# Altium PCB Soldeerbout12002498.PcbDoc
Units mm, origin at the board's own origin, x right, y up, seen from the top; angles counter-clockwise.
Board outline 152.4 x 101.6 mm, 2 copper layers (Top Layer, Bottom Layer); 76 components, 75 nets, 278 pads, 15 vias.
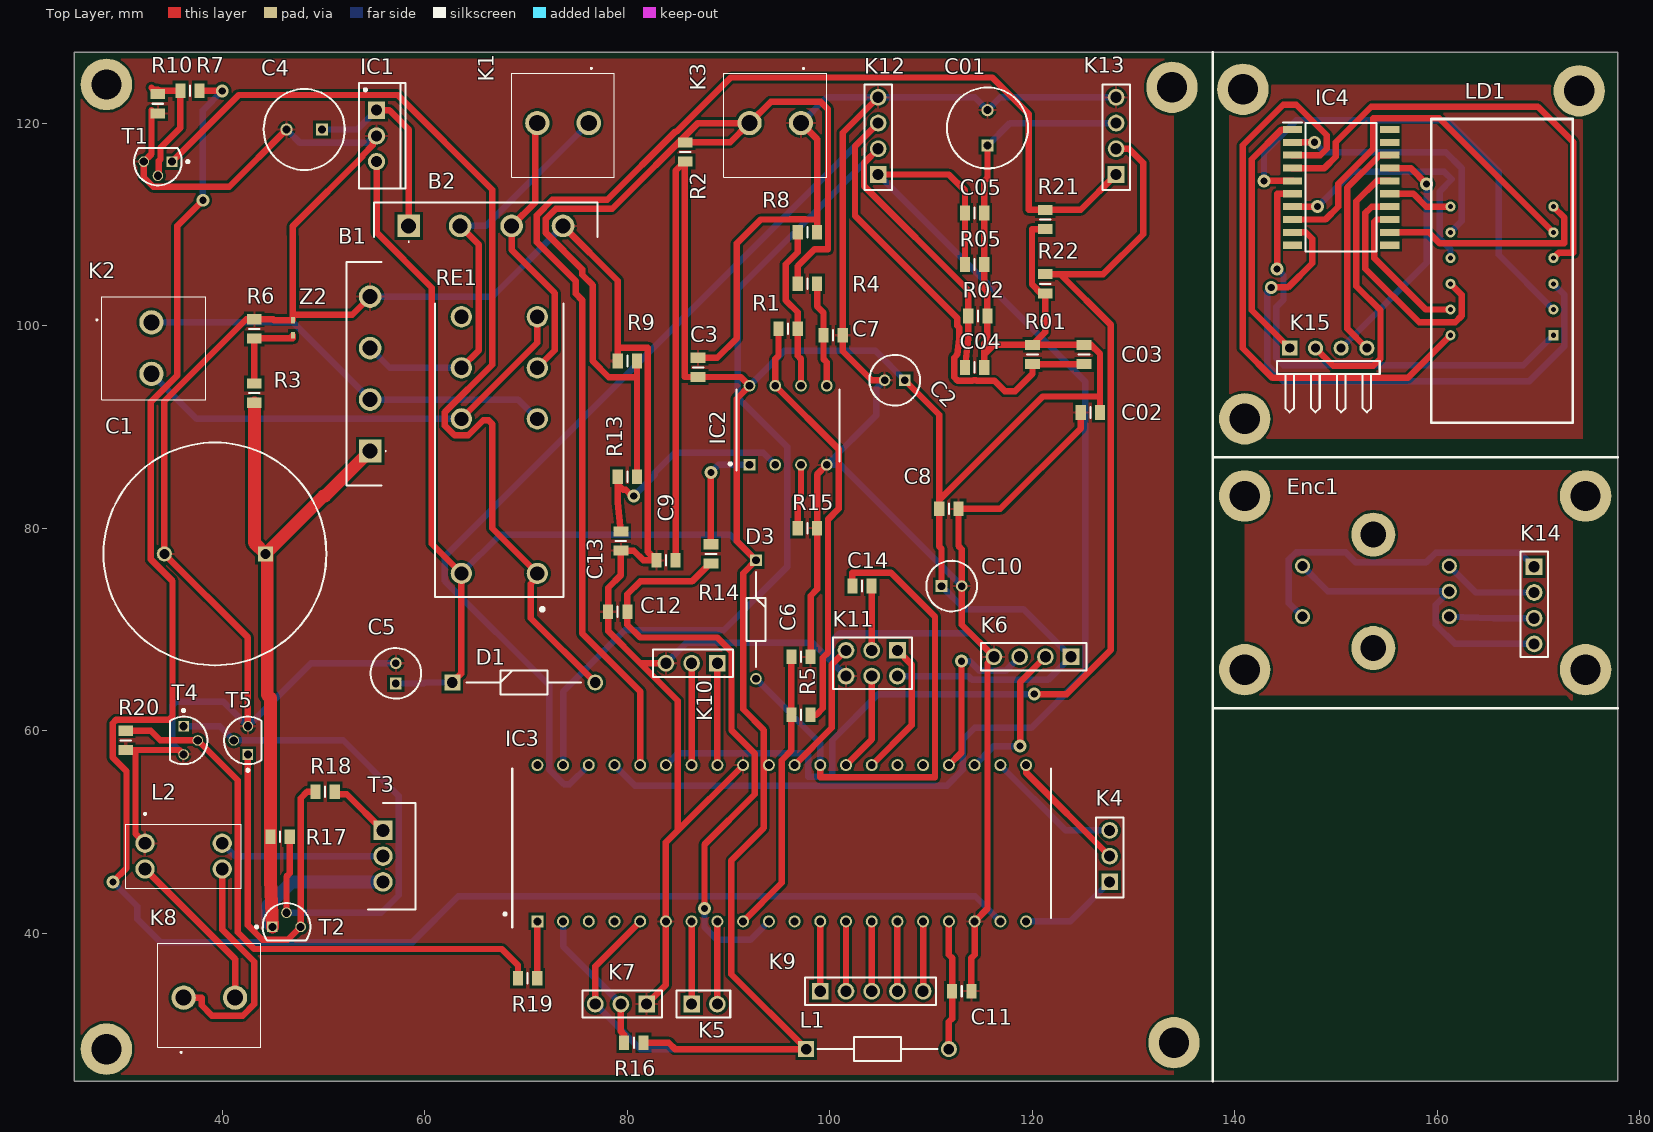
[diagram p0: Top Layer view]
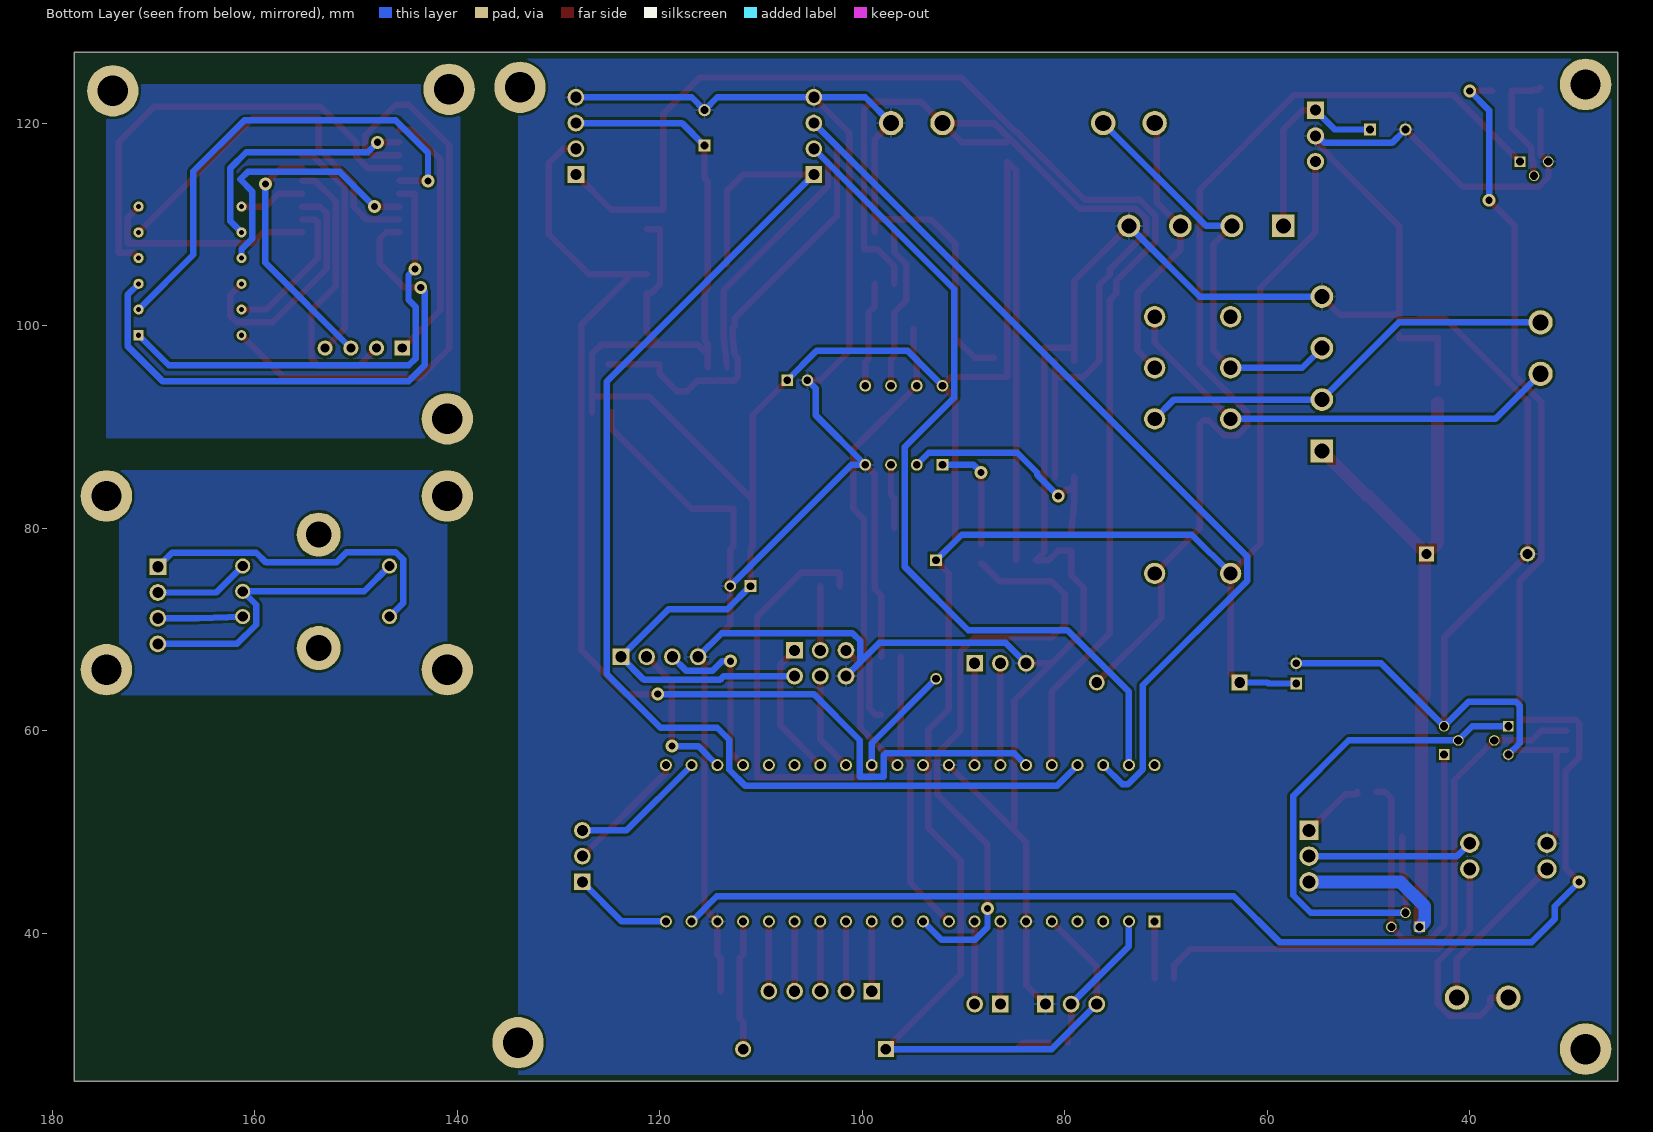
[diagram p1: Bottom Layer view, seen from below]
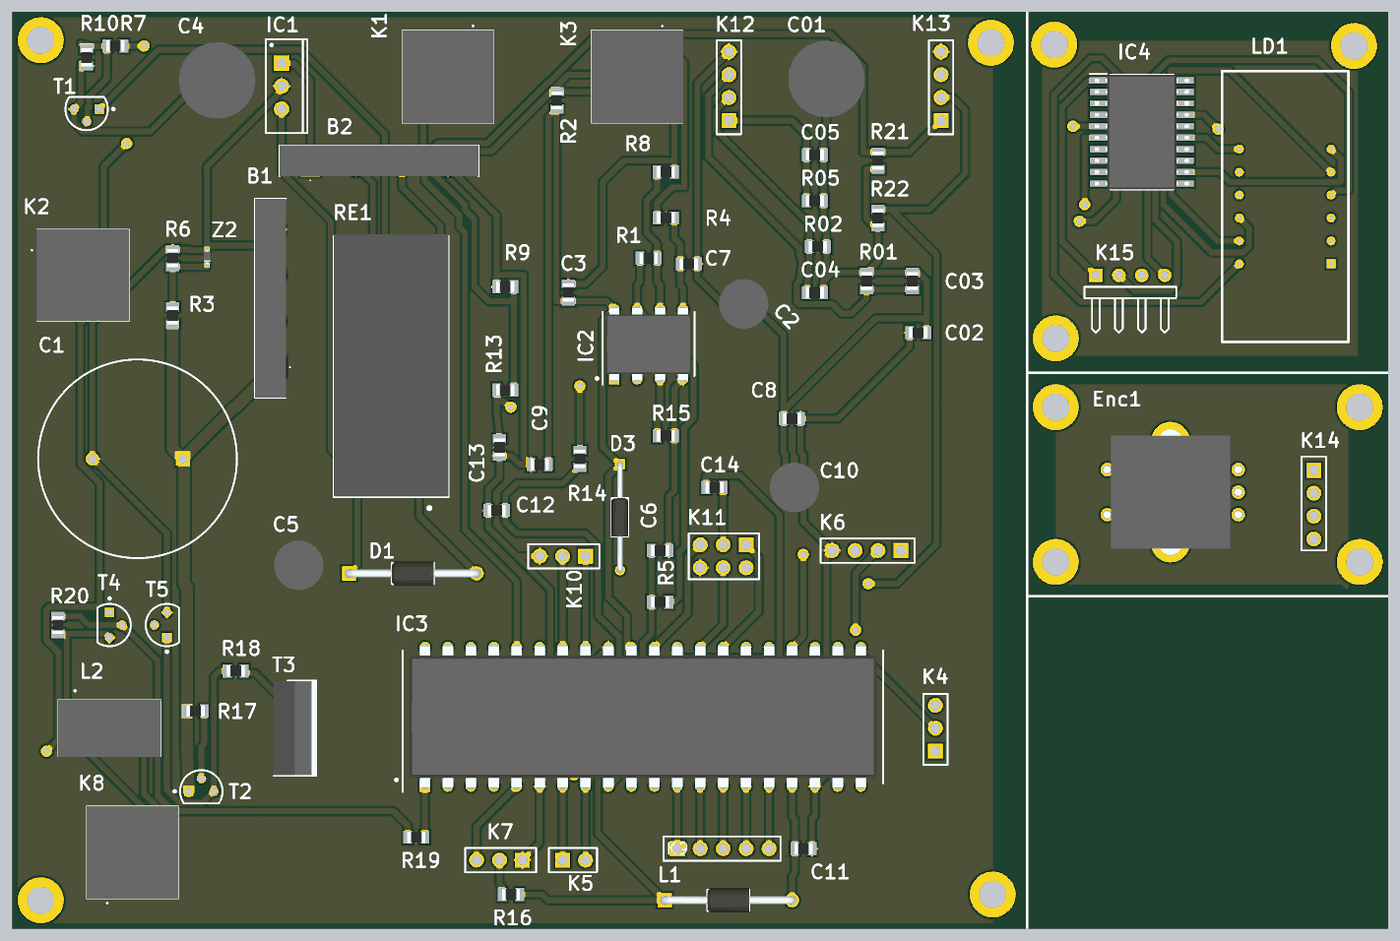
[diagram p2: 3D render of the assembled board from above, using the file's embedded part models]

## Layer stack, top to bottom
Top Solder: solder mask 0.0102, Solder Resist, Dk 3.5
Top Layer: signal copper 0.0356
Dielectric 1: dielectric 0.32, FR-4, Dk 4.8
Bottom Layer: signal copper 0.0356
Bottom Solder: solder mask 0.0102, Solder Resist, Dk 3.5

## Board outline
25.4,25.4 177.8,25.4 177.8,127 25.4,127

## Design rules (kind name [scope] priority, off if disabled: settings)
Clearance [All] p1: gap=0.254 ignorepadtopadclearanceinfootprint=FALSE except(0: Arc-Hole Track-Hole SMDPad-Hole THPad-Hole Via-Hole Fill-Hole Poly-Hole Region-Hole Text-Hole)
PolygonConnect [All] p1: connectstyle=Relief reliefconductorwidth=0.254 reliefentries=4 polygonreliefangle="90 Angle" airgapwidth=0.254
RoutingVias [All] p1: holewidth=0.711 width=1.27 viastyle="Through Hole" minholewidth=0.711 minwidth=1.27 maxholewidth=0.711 maxwidth=1.27
SolderMaskExpansion [All] p1: expansion=0.102 istentingtop=FALSE
Width [All] p1: maxlimit=2.54 minlimit=0.635 preferedwidth=0.635 minimp=50.000000 maximp=50.000000 favimp=50.000000
30 further rules are at their usual default settings.

## Classes and differential pairs
component class Voeding: B1 B2 C1 C4 C5 D1 IC1 K1 K2 R3 R6 R7 R10 RE1 T1 Z2
component class Versterkers: C2 C3 C6 C7 C12 C13 IC2 K3 R1 R2 R4 R5 R8 R9 R13 R14 R15
component class TM16+LED: IC4 K15 LD1
component class Microchip: C8 C9 C10 C11 C14 D3 IC3 K4 K5 K6 K7 K9 K10 K11 L1 R16 R19
component class KoppelingBout: K8 L2 R17 R18 R20 T2 T3 T4 T5
component class Display: C01 C02 C03 C04 C05 Enc1 K12 K13 K14 R01 R02 R05 R21 R22

## Components (designator, comment, footprint, x,y, rotation, side; value= is the part's Value field where it differs from the comment)
B1 "Bruggelijkrichter-600V-6A" Bruggelijkrichter-600V-6A 54.61,87.63 r270 top
B2 "Bruggelijkrichter-600V-6A" Bruggelijkrichter-600V-6A 58.42,109.855 r180 top
C1 "C4700µFth" C4700µFth 44.29,77.47 r180 top
C01 "C100µFth" C100µFth 115.57,117.785 r90 top
C2 "C10µFth" C10µFth 107.41,94.615 r180 top
C02 "C0805smd" 0805 125.73,91.44 r180 top
C3 "100n" 0805 86.995,95.885 r90 top
C03 "10n" 0805 125.095,97.155 r270 top
C4 "C100µFth" C100µFth 49.855,119.38 r180 top
C04 "10n" 0805 114.3,95.885 r180 top
C5 "C10µFth" C10µFth 57.15,64.675 r90 top
C05 "10n" 0805 114.3,111.125 r180 top
C6 "10nf" 0805 97.155,67.31 r0 top
C7 "10nf" 0805 100.33,99.06 r0 top
C8 "100n" 0805 111.76,81.915 r0 top
C9 "100n" 0805 83.82,76.835 r180 top
C10 "C10µFth" C10µFth 111.03,74.295 r0 top
C11 "100n" 0805 113.03,34.29 r0 top
C12 "10nf" 0805 79.06,71.755 r180 top
C13 "10nf" 0805 79.375,78.74 r270 top
C14 "100n" 0805 103.185,74.295 r180 top
D1 "1N4007" 1N4007 62.735,64.77 r0 top
D3 "1N4148" 1N4148 92.71,76.835 r270 top
Enc1 "encoder" encoder 161.17,71.275 r90 top
IC1 "L78S05CV" 5V_Regulator-2A 55.245,118.745 r270 top
IC2 "Dual-opamp-6002" Dual-opamp-6002 95.885,90.17 r90 top
IC3 "8-Microchip" 8-bit-MCU-ATMEGA4809-PF 95.25,48.895 r90 top
IC4 "TM1637__SOP_" SOIC127P1045X280-20N 150.495,113.665 r0 top
K1 "ScrewH2" ScewH2 76.2,120.015 r180 top
K2 "ScrewH2" ScewH2 33.02,100.33 r270 top
K3 "ScrewH2" ScewH2 97.155,120.015 r180 top
K4 "Headers 1x3" "Headers 1x3" 127.635,45.085 r90 top
K5 "Headers 1x2" "Headers 1x2" 86.36,33.02 r0 top
K6 "Headers 1x4" "Headers 1x4" 123.825,67.31 r180 top
K7 "Headers 1x3" "Headers 1x3" 81.915,33.02 r180 top
K8 "ScrewH2" ScewH2 36.195,33.655 r0 top
K9 "Headers 1x5" "Headers 1x5" 99.06,34.29 r0 top
K10 "Headers 1x3" "Headers 1x3" 88.9,66.675 r180 top
K11 "Headers 2x3" "Headers 2x3" 106.68,67.945 r180 top
K12 "Headers 1x4" "Headers 1x4" 104.775,114.935 r90 top
K13 "Headers 1x4" "Headers 1x4" 128.27,114.935 r90 top
K14 "Headers 1x4" "Headers 1x4" 169.545,76.2 r270 top
K15 "Header 4H" HDR1X4H 145.415,97.79 r0 top
L1 "10µH" Smoorspoel-130mA 97.66,28.575 r0 top
L2 "smoorspoel-10A" smoorspoel-10A 32.385,48.895 r270 top
LD1 "4dig7seg" 4Digit7seg 166.37,105.41 r90 top
R1 "18K" 0805 95.885,99.695 r0 top
R01 "10k" 0805 120.015,97.155 r270 top
R2 "1M" 0805 85.725,117.16 r270 top
R02 "10K" 0805 114.615,100.965 r180 top
R3 "68K" 0805 43.18,93.345 r90 top
R4 "5K6" 0805 97.79,104.14 r0 top
R5 "5K6" 0805 97.155,61.595 r0 top
R05 "10K" 0805 114.3,106.045 r180 top
R6 "10K" 0805 43.18,99.695 r90 top
R7 "10K" 0805 36.83,123.19 r0 top
R8 "100" 0805 97.79,109.22 r0 top
R9 "10M" 0805 80.01,96.52 r180 top
R10 "4K7" 0805 33.655,121.92 r270 top
R13 "5K6" 0805 80.01,85.09 r180 top
R14 "5K6" 0805 88.265,77.47 r90 top
R15 "100" 0805 97.79,80.01 r0 top
R16 "4K7" 0805 80.645,29.21 r180 top
R17 "4K7" 0805 45.72,49.53 r0 top
R18 "100" 0805 50.165,53.975 r0 top
R19 "R-0805" 0805 70.165,35.56 r0 top
R20 "4K7" 0805 30.48,59.055 r270 top
R21 "4K7" 0805 121.285,110.49 r270 top
R22 "4K7" 0805 121.285,104.14 r270 top
RE1 "RT424005F" vermogenrelais-5VDC-8A 67.37,75.545 r90 top
T1 "BC547CG" BC547C 33.655,116.205 r180 top
T2 "BC547CG" BC547C 46.355,40.64 r0 top
T3 "Mosfet-55V-17A-100mOhm" Mosfet-55V-17A-100mOhm 55.88,50.165 r270 top
T4 "BC547CG" BC547C 36.195,59.055 r270 top
T5 "BC557CG" BC557C 42.545,59.055 r90 top
Z2 "zenerdiode-5,1V-0,5W" zenerdiode-5,1V-0,5W 46.99,99.81 r90 top

## Footprints (in the part's own frame and the unit in brackets; to place one, negate y for a bottom-side part, rotate by r counter-clockwise, add the part's x,y. Pads: shape width x height; smd on the part's side, far side on the other; paste and mask are expansions set on the pad)
1N4007 [mm]
  rect 1.575x1.575 hole 1.05: 1(0,0)
  round 1.575 hole 1.05: 2(14.1,0)
  silkscreen extent 1.4,-1.18 12.7,1.18, body extent -0.43,-1.36 14.51,1.36, height 2.71
1N4148 [mm]
  rect 1.15x1.15 hole 0.75: 1(0,0)
  round 1.15 hole 0.75: 2(11.7,0)
  silkscreen extent 1.14,-0.93 10.54,0.93, body extent -0.28,-0.92 11.93,0.92, height 1.84
4Digit7seg [mm]
  rect 1x1 hole 0.5 mask+0.102: 1(-6.35,-5.08)
  round 1 hole 0.5: 2(-3.81,-5.08) 3(-1.27,-5.08) 4(1.27,-5.08) 5(3.81,-5.08) 6(6.35,-5.08) 7(-6.35,5.08) 8(-3.81,5.08) 9(-1.27,5.08) 10(1.27,5.08) 11(3.81,5.08) 12(6.35,5.08)
  silkscreen extent -15,-7 15,7
5V_Regulator-2A [mm] "TO, Thru-Hole, Vertical, Heatsink Mounted; 3 In-Line Leads; Pitch 2.54 mm"
  rect 1.7x1.7 hole 1.1: 1(-2.54,0)
  round 1.7 hole 1.1: 2(0,0) 3(2.54,0)
  silkscreen extent -5.2,-1.75 5.2,2.85, body extent -5.25,-1.8 5.25,2.9, height 19.7
8-bit-MCU-ATMEGA4809-PF [mm]
  rect 1.184x1.184 hole 0.784: 1(-7.715,24.13)
  round 1.184 hole 0.784: 2(-7.715,21.59) 3(-7.715,19.05) 4(-7.715,16.51) 5(-7.715,13.97) 6(-7.715,11.43) 7(-7.715,8.89) 8(-7.715,6.35) 9(-7.715,3.81) 10(-7.715,1.27) 11(-7.715,-1.27) 12(-7.715,-3.81) 13(-7.715,-6.35) 14(-7.715,-8.89) 15(-7.715,-11.43) 16(-7.715,-13.97) 17(-7.715,-16.51) 18(-7.715,-19.05) 19(-7.715,-21.59) 20(-7.715,-24.13) 21(7.715,-24.13) 22(7.715,-21.59) 23(7.715,-19.05) 24(7.715,-16.51) 25(7.715,-13.97) 26(7.715,-11.43) 27(7.715,-8.89) 28(7.715,-6.35) 29(7.715,-3.81) 30(7.715,-1.27) 31(7.715,1.27) 32(7.715,3.81) 33(7.715,6.35) 34(7.715,8.89) 35(7.715,11.43) 36(7.715,13.97) 37(7.715,16.51) 38(7.715,19.05) 39(7.715,21.59) 40(7.715,24.13)
  silkscreen extent -8.31,-26.61 7.37,27.43, body extent -7.86,-25.88 7.86,25.88, height 6.35
0805 [mm]
  rect 1x1.45 smd: 1(-0.95,0) 2(0.95,0)
  silkscreen extent 0,-0.53 0,0.53, body extent -1,-0.63 1,0.63, height 0.55
BC547C [mm] "TO, 3-Leads, Body Dia 4.7mm, Pitch 1.27mm"
  rect 1.05x1.05 hole 0.8: 1(-1.397,0)
  round 1.05 hole 0.8: 2(0,1.397) 3(1.397,0)
  silkscreen extent -3.08,-1.34 2.35,2.35, body extent -2.35,-1.33 2.36,2.36, height 7.87
BC557C [mm] "TO, 3-Leads, Body Dia 4.7mm, Pitch 1.27mm"
  rect 1.05x1.05 hole 0.8: 1(-1.397,0)
  round 1.05 hole 0.8: 2(0,1.397) 3(1.397,0)
  silkscreen extent -3.07,-1.34 2.35,2.35, body extent -2.35,-1.33 2.36,2.36, height 7.87
Bruggelijkrichter-600V-6A [mm]
  rect 2.235x2.235 hole 1.49: 1(0,0)
  round 2.235 hole 1.49: 2(-5.08,0) 3(-10.16,0) 4(-15.24,0)
  silkscreen extent -18.65,-2.32 3.41,1.6, body extent -18.65,-2.32 3.4,1.11, height 18.9
C10µFth [mm]
  rect 1.15x1.15 hole 0.75: 1(0,0)
  round 1.15 hole 0.75: 2(2,0)
  silkscreen extent -1.5,-2.5 3.5,2.5, body extent -1.75,-2.75 3.75,2.75, height 12
C100µFth [mm]
  rect 1.2x1.2 hole 0.8: 1(0,0)
  round 1.2 hole 0.8: 2(3.5,0)
  silkscreen extent -2.25,-4 5.75,4, body extent -2.5,-4.25 6,4.25, height 12.5
C4700µFth [mm]
  rect 1.5x1.5 hole 1: 1(0,0)
  round 1.5 hole 1: 2(10,0)
  silkscreen extent -6,-11 16,11
Dual-opamp-6002 [mm]
  rect 1.158x1.158 hole 0.758: 1(-3.905,3.81)
  round 1.158 hole 0.758: 2(-3.905,1.27) 3(-3.905,-1.27) 4(-3.905,-3.81) 5(3.905,-3.81) 6(3.905,-1.27) 7(3.905,1.27) 8(3.905,3.81)
  silkscreen extent -4.48,-5.08 3.56,5.84, body extent -4.04,-4.75 4.04,4.75, height 5.33
encoder [mm]
  round 1.5 hole 1: A1(0,0) B1(5,0) C1(2.5,0) MH1(0,14.5) MH2(5,14.5)
  round 4.35 hole 2.54: MH3(-3.1,7.5) MH4(8.1,7.5)
  body extent -4.44,-0.4 9.45,14.9, height 17.6
HDR1X4H [mm] "Connector; Header; 4 Position; Right Angle"
  rect 1.5x1.5 hole 0.9: 1(0,0)
  round 1.5 hole 0.9: 2(2.54,0) 3(5.08,0) 4(7.62,0)
  silkscreen extent -1.27,-6.35 8.89,-1.27
"Headers 1x2" [mm]
  rect 1.65x1.65 hole 1.1: 1(0,0)
  round 1.65 hole 1.1: 2(2.54,0)
  silkscreen extent -1.52,-1.35 3.81,1.35
"Headers 1x3" [mm]
  rect 1.65x1.65 hole 1.1: 1(0,0)
  round 1.65 hole 1.1: 2(2.54,0) 3(5.08,0)
  silkscreen extent -1.52,-1.35 6.35,1.35
"Headers 1x4" [mm]
  rect 1.65x1.65 hole 1.1: 1(0,0)
  round 1.65 hole 1.1: 2(2.54,0) 3(5.08,0) 4(7.62,0)
  silkscreen extent -1.52,-1.35 8.89,1.35
"Headers 1x5" [mm]
  rect 1.65x1.65 hole 1.1: 1(0,0)
  round 1.65 hole 1.1: 2(2.54,0) 3(5.08,0) 4(7.62,0) 5(10.16,0)
  silkscreen extent -1.52,-1.35 11.43,1.35
"Headers 2x3" [mm]
  rect 1.65x1.65 hole 1.1: 1(0,0)
  round 1.65 hole 1.1: 2(0,2.54) 3(2.54,0) 4(2.54,2.54) 5(5.08,0) 6(5.08,2.54)
  silkscreen extent -1.45,-1.27 6.35,3.81
Mosfet-55V-17A-100mOhm [mm]
  rect 1.92x1.92 hole 1.28: 1(0,0)
  round 1.92 hole 1.28: 2(2.54,0) 3(5.08,0)
  silkscreen extent -2.73,-1.49 7.81,3.2, body extent -2.67,-1.5 7.75,3.19, height 18.84
ScewH2 [mm]
  round 2.4 hole 1.6: 1(0,0) 2(5.08,0)
  silkscreen extent -2.54,-5.45 7.62,5.35, body extent -2.54,-4.9 7.62,5.35, height 14.1
smoorspoel-10A [mm]
  round 1.905 hole 1.27: 1(0,0) 2(2.54,0) 3(2.54,7.62) 4(0,7.62)
  silkscreen extent -3,-1.88 4.42,9.5, body extent -1.88,-1.88 4.42,9.5, height 9.6
Smoorspoel-130mA [mm]
  rect 1.575x1.575 hole 1.05: 1(0,0)
  round 1.575 hole 1.05: 2(14.1,0)
  silkscreen extent 1.14,-1.18 12.96,1.18, body extent -0.43,-1.36 14.51,1.36, height 2.71
SOIC127P1045X280-20N [mm]
  rect 1.9x0.7 smd: 1(-4.8,5.715) 2(-4.8,4.445) 3(-4.8,3.175) 4(-4.8,1.905) 5(-4.8,0.635) 6(-4.8,-0.635) 7(-4.8,-1.905) 8(-4.8,-3.175) 9(-4.8,-4.445) 10(-4.8,-5.715) 11(4.8,-5.715) 12(4.8,-4.445) 13(4.8,-3.175) 14(4.8,-1.905) 15(4.8,-0.635) 16(4.8,0.635) 17(4.8,1.905) 18(4.8,3.175) 19(4.8,4.445) 20(4.8,5.715)
  silkscreen extent -5.75,-6.35 3.5,6.42, body extent -5.23,-6.35 5.23,6.35, height 2.8
vermogenrelais-5VDC-8A [mm]
  round 2.1 hole 1.4: 11(20.3,3.75) 12(15.26,3.75) 14(25.34,3.75) 21(20.3,-3.75) 22(15.26,-3.75) 24(25.34,-3.75) A1(0,3.75) A2(0,-3.75)
  silkscreen extent -3.67,-6.35 26.65,6.35, body extent -2.21,-6.35 26.79,6.35, height 15.86
zenerdiode-5,1V-0,5W [mm]
  rect 0.64x0.42 smd: 1(-0.75,0) 2(0.75,0)
  body extent -0.8,-0.4 0.8,0.4, height 0.7

## Part data
B1 B2: "Bridge Rectifier", Manufacturer_Name=Vishay, Manufacturer_Part_Number=GBU6J-E3/45, Datasheet Link=http://www.vishay.com/docs/88615/gbu6a.pdf, Height=18.8mm
C1: "Capacitor Polarised", Manufacturer_Name=Kemet, Manufacturer_Part_Number=ESK478M050AQ3AA, Mouser2 Part Number=80-ESK478M050AQ3AA, Datasheet Link=https://componentsearchengine.com//ESK478M050AQ3AA.pdf, Height=37mm, Mouser2 Price/Stock=https://www.mouser.com/Search/Refine.aspx?Keyword=80-ESK478M050AQ3AA
C01 C4: "Capacitor Polarised", Manufacturer_Name=Kemet, Manufacturer_Part_Number=ESK107M050AG3EA, Height=12.5mm
C2 C5 C10: "Capacitor Polarised", Manufacturer_Name=Panasonic, Manufacturer_Part_Number=ECA-1HM100I, Mouser2 Part Number=667-ECA-1HM100I, Datasheet Link=https://componentsearchengine.com//ECA-1HM100I.pdf, Height=12mm, Mouser2 Price/Stock=https://www.mouser.com/Search/Refine.aspx?Keyword=667-ECA-1HM100I
C02: "Capacitor", Manufacturer_Name=Kemet, Manufacturer_Part_Number=C0805C301G5GACTU, Datasheet Link=https://connect.kemet.com:7667/gateway/IntelliData-ComponentDocumentation/1.0/download/specsheet/C0805C301G5GACTU, Height=0.88mm
C3 C03 C04 C05 C6 C7 C8 C9 C11 C12 C13 C14: library part C0805smd, "Capacitor", Manufacturer_Name=Kemet, Manufacturer_Part_Number=C0805C301G5GACTU, Datasheet Link=https://connect.kemet.com:7667/gateway/IntelliData-ComponentDocumentation/1.0/download/specsheet/C0805C301G5GACTU, Height=0.88mm
D1: "Diode", Manufacturer_Name=Rectron, Manufacturer_Part_Number=1N4007-T, Mouser2 Part Number=583-1N4007-T, Datasheet Link=https://componentsearchengine.com//1N4007-T.pdf, Mouser2 Price/Stock=https://www.mouser.com/Search/Refine.aspx?Keyword=583-1N4007-T
D3: "Diode", Manufacturer_Name=Nexperia, Datasheet Link=https://datasheet.datasheetarchive.com/originals/distributors/Datasheets-112/DSAP0040891.pdf, Manufacturer_Part_Number=1N4148
Enc1: "Undefined or Miscellaneous", Manufacturer_Name="Alpha (Taiwan)", Manufacturer_Part_Number=RE130F-41-175F-12P, Mouser2 Part Number=318-ENC130175F-12PS, Datasheet Link=https://componentsearchengine.com//RE130F-41-175F-12P.pdf, Height=17.5mm, Mouser2 Price/Stock=https://www.mouser.com/Search/Refine.aspx?Keyword=318-ENC130175F-12PS
IC1: library part 5V_Regulator-2A, "2A Positive Voltage Regulator, 5V, 3-Pin TO-220", ComponentLink1Description="Manufacturer URL", ComponentLink1URL=http://www.st.com, ComponentLink2Description=Datasheet, ComponentLink2URL=http://www.st.com/internet/com/TECHNICAL_RESOURCES/TECHNICAL_LITERATURE/DATASHEET/CD00000449.pdf, ComponentLink3Description="Package Specification", ComponentLink3URL=http://www.st.com/internet/com/TECHNICAL_RESOURCES/TECHNICAL_LITERATURE/PACKAGE_INFORMATION/CD00004649.pdf, DatasheetVersion=1/03/2010, PackageDescription="TO, Thru-Hole, Vertical, Heatsink Mounted; 3 In-Line Leads; Pitch 2.54 mm", PackageReference=TO220, PackageVersion=ver3.0
IC2: "Integrated Circuit", Manufacturer_Name=Microchip, Manufacturer_Part_Number=MCP6002-E/P, Mouser2 Part Number=579-MCP6002-E/P, Datasheet Link=https://componentsearchengine.com//MCP6002-E_P.pdf, Height=5.334mm, Mouser2 Price/Stock=https://www.mouser.com/Search/Refine.aspx?Keyword=579-MCP6002-E%2FP
IC3: "Integrated Circuit", Manufacturer_Name=Microchip, Manufacturer_Part_Number=ATMEGA4809-PF, Mouser2 Part Number=556-ATMEGA4809-PF, Datasheet Link=https://componentsearchengine.com//ATMEGA4809-PF.pdf, Height=6.35mm, Mouser2 Price/Stock=https://www.mouser.com/Search/Refine.aspx?Keyword=556-ATMEGA4809-PF
IC4: "Integrated Circuit", Manufacturer_Name="TITAN MICRO ELECTRONICS", Manufacturer_Part_Number="TM1637 (SOP)", Datasheet Link=https://www.mcielectronics.cl/website_MCI/static/documents/Datasheet_TM1637.pdf, Height=2.8mm
K1 K2 K3 K8: "Connector", Manufacturer_Name="CUI Inc.", Manufacturer_Part_Number=TB007-508-02BE, Mouser2 Part Number=490-TB007-508-02BE, Datasheet Link=https://componentsearchengine.com//TB007-508-02BE.pdf, Height=14mm, Mouser2 Price/Stock=https://www.mouser.com/Search/Refine.aspx?Keyword=490-TB007-508-02BE
K4 K5 K6 K7 K9 K10 K12 K13 K14: "Connector", Manufacturer_Name="TE Connectivity", Manufacturer_Part_Number=2-826646-0, Datasheet Link=https://componentsearchengine.com/Datasheets/1/2-826646-0.pdf, Height=8.8mm
K11: "Connector", Manufacturer_Name=Harwin, Manufacturer_Part_Number=M20-9761042, Mouser2 Part Number=855-M20-9761042, Datasheet Link=https://componentsearchengine.com//M20-9761042.pdf, Height=8.38mm, Mouser2 Price/Stock=https://www.mouser.com/Search/Refine.aspx?Keyword=855-M20-9761042
K15: "Header, 4-Pin, Right Angle", LatestRevisionDate=17-Jul-2002, LatestRevisionNote="Re-released for DXP Platform.", Publisher="Altium Limited"
L1: library part Smoorspoel-130mA, "THT Common Mode Power Line Choke WE-CMB, L = 1.00 mH", Inductance="1.00 mH", ComponentLink1Description="Manufacturer Link", ComponentLink1URL=http://www.we-online.com, ComponentLink2Description=Datasheet, ComponentLink2URL=http://www.we-online.de/katalog/media/pdf/744824101.pdf, DatasheetVersion="ver 5, Oct-2004", PackageDescription="THT Inductor, 4-Leads, Body 27.5 x 18.5 mm", PackageReference=WE-CMB-L, PackageVersion=2004
L2: "Transformer", Manufacturer_Name="Laird Technologies", Manufacturer_Part_Number=CM2545X171B-10, Datasheet Link=https://datasheet.datasheetarchive.com/originals/dk/DKDS-7/122753.pdf, Height=9.5mm
R1 R01 R2 R02 R3 R4 R5 R05 R6 R7 R8 R9 R10 R13 R14 R15 R16 R17 R18 R20 R21 R22: library part R-0805, "Resistor", Manufacturer_Name=Vishay, Manufacturer_Part_Number=TNPU0805500RAZEN00, Height=0.55mm
R19: "Resistor", Manufacturer_Name=Vishay, Manufacturer_Part_Number=TNPU0805500RAZEN00, Height=0.55mm
RE1: library part vermogenrelais-5VDC-8A, "RELAY GENERAL PURPOSE DPDT 8A 5V", Coil Current=80.6mA, Coil Power=500mW, Coil Resistance=62R, Coil Voltage (DC)=5V, Contact Current Rating=8A, Contact Voltage Rating (AC)=250V, Dropout Voltage=500mV, Max Operating Temperature=85°C, Max Voltage Rating (AC)=400V, Min Operating Temperature=-40°C, Package Quantity=5000, Power Consumption=400mW, Coil Type=Non-Latching, Contact Material=Silver, ELV=Compliant, Height=15.7mm, Lead Free="Lead Free", Length=29mm, Mount="Through Hole", Operate Time=7ms, Packaging=Carton, Radiation Hardening=No, Relay Type="General Purpose", Release Time=3ms, RoHS Compliant=Yes, Series=RT2, Termination=PCB, Throw Configuration=DPDT, Weight=13g, Width=12.7mm
T1 T2 T4: library part BC547C, "Amplifier Transistor, NPN Silicon, 3-Pin TO-92, Pb-Free, Bulk Box", Manufacturer="On Semiconductor", ComponentLink1Description="Manufacturer URL", ComponentLink1URL=http://www.onsemi.com/, ComponentLink2Description=Datasheet, ComponentLink2URL=http://www.onsemi.com/pub_link/Collateral/BC546-D.PDF, ComponentLink3Description="Package Specification", ComponentLink3URL=http://www.onsemi.cn/pub_link/Collateral/2N6426-D.PDF, DatasheetVersion="Rev. 7", fT Min (MHz)=150, IC Continuous (A)=0.1, Mounting Technology="Through Hole", PackageDescription="3-Pin Transistor Outline, Body 4.825 x 3.685 mm, Pitch 1.27 mm", PackageReference=TO-92-3-29-11_AM_SL, PackageVersion="Rev. AM", Packing="Bulk Box", PartNumber=BC547CG, Polarity=NPN, RoHS=TRUE
T3: "MOSFET (P-Channel)", Manufacturer_Name=Infineon, Manufacturer_Part_Number=IRF9Z34NPBF, Mouser2 Part Number=942-IRF9Z34NPBF, Datasheet Link=https://componentsearchengine.com//IRF9Z34NPBF.pdf, Height=4.69mm, Mouser2 Price/Stock=https://www.mouser.com/Search/Refine.aspx?Keyword=942-IRF9Z34NPBF
T5: library part BC557C, "Amplifier Transistor, PNP Silicon, 3-Pin TO-92, Pb-Free, Bulk Box", Manufacturer="On Semiconductor", ComponentLink1Description="Manufacturer URL", ComponentLink1URL=http://www.onsemi.com/, ComponentLink2Description=Datasheet, ComponentLink2URL=http://www.onsemi.com/pub_link/Collateral/BC556B-D.PDF, ComponentLink3Description="Package Specification", ComponentLink3URL=http://www.onsemi.cn/pub_link/Collateral/2N6426-D.PDF, DatasheetVersion="Rev. 3", IC Continuous (A)=-0.1, Mounting Technology="Through Hole", PackageDescription="3-Pin Transistor Outline, Body 4.825 x 3.685 mm, Pitch 1.27 mm", PackageReference=TO-92-3-29-11_AM_SL, PackageVersion="Rev. AM", Packing="Bulk Box", PartNumber=BC557CG, Polarity=PNP, RoHS=TRUE
Z2: "Zener Diode", Manufacturer_Name="ON Semiconductor", Manufacturer_Part_Number=MM5Z4689T1G, Datasheet Link=https://www.mouser.in/datasheet/2/308/1/MM5Z4678T1_D-2315920.pdf, Height=0.7mm

## Free pads (board coordinates)
  round 5.08 hole 3: 7(133.789,123.541) 8(140.797,123.341) 9(173.99,123.19) 10(140.97,90.805) 11(140.97,83.185) 12(174.625,83.185) 13(174.625,66.04) 14(140.97,66.04) 15(133.985,29.21) 16(28.575,28.575) 17(28.575,123.825)

## Via types
v1: diameter 1.27, hole 0.711, Top Layer to Bottom Layer, 15 vias

## Nets (pads, with @x,y where several pads share a name; then routed paths per layer and width w, separated by ;. In a path a pad name is that pad's centre, name@x,y a point inside that pad or via, vN(x,y) a via of type N, cw(c..) or ccw(c..) an arc to the next point about the centre after c; other vN are vias at no path point)
+5: C01.1 C02.1 C2.1 C03.1 C3.1 C04.1 C5.1 C05.1 C8.1 C9.1 C10.1 D1.1 D3.1 IC1.3 IC2.8 IC3.5 IC3.31 K6.1 K7.3 K11.2 K13.3 L1.1 R01.1 R02.1 R2.2 R05.1 R16.1 R21.2 R22.2 RE1.A1 | length 444.3
  Top Layer w0.635: IC1.3 55.245,109.22 60.706,103.759 60.706,78.459 RE1.A1 63.62,65.655 D1.1 ; K7.3 76.835,36.735 IC3.5 ; R16.1 84.083,29.21 84.718,28.575 L1.1 90.272,35.963 90.272,47.193 93.493,50.414 IC3.31@93.493,56.61 ; C9.1 84.77,115.306 R2.2@85.674,116.21 ; R2.2 R2.2@85.674,116.21 ; IC3.31 IC3.31@93.493,56.61 ; C2.1 110.81,91.215 110.81,82.794 ; C10.1 111.03,77.978 110.81,78.198 C8.1 110.81,82.794 ; C04.1 115.25,97.155 ; C01.1 115.57,114.595 115.25,114.275 C05.1 R05.1 115.25,103.642 115.565,103.327 R02.1 115.565,98.562 115.25,98.247 115.25,97.155 ; R21.2 119.964,109.54 119.964,104.089 120.863,103.19 R22.2 121.285,99.375 R01.1 ; C02.1 126.68,93.015 ; R2.2@85.674,116.21 85.674,94.935 C3.1 91.215,94.935 IC2.8 90.805,92.805 90.805,78.74 D3.1 91.44,75.565 91.44,62.128 93.493,60.076 IC3.31@93.493,56.61 ; 110.81,82.794 121.031,93.015 126.68,93.015 ; 115.25,97.155 116.2,98.105 R01.1 ; R01.1 C03.1 125.796,98.105 126.68,97.221 126.68,93.015
  Bottom Layer w0.635: C5.1 59.893,64.675 59.988,64.77 D1.1 ; RE1.A1 67.45,79.375 90.17,79.375 D3.1 ; K7.3 81.28,28.575 L1.1 ; IC2.8 95.521,97.521 104.504,97.521 C2.1 ; K11.2 113.665,65.405 114.046,65.024 121.539,65.024 K6.1 119.126,72.009 113.316,72.009 C10.1 ; C01.1 117.8,120.015 K13.3
GND: B1.4 B2.4 C01.2 C1.2 C2.2 C02.2 C3.2 C4.2 C5.2 C6.2 C7.2 C8.2 C9.2 C10.2 C11.2 C12.2 C13.2 IC1.2 IC2.4 IC3.6 IC3.18 IC3.32 K3.1 K6.4 K7.1 K10.3 K11.6 K12.4 K13.4 L2.1 R6.2 R8.2 R9.2 R10.2 R15.2 R20.2 T1.3 T4.3 T5.3 Z2.2 | length 542.7
  Top Layer w0.635: R20.2 31.445,58.105 ; L2.1 31.445,49.835 31.445,58.105 ; R10.2@33.02,121.285 33.02,116.967 T1.3 32.258,114.654 33.201,113.711 40.686,113.711 C4.2 C4.2@46.421,119.446 ; T4.3 35.748,58.105 31.445,58.105 ; T5.3 42.545,69.215 C1.2 34.29,92.558 42.377,100.645 R6.2 45.034,100.645 45.119,100.56 Z2.2 46.99,101.092 ; B1.4 52.832,101.092 46.99,101.092 ; IC1.2 55.245,118.457 54.87,118.082 54.87,117.841 53.823,116.794 53.823,116.688 47.139,110.004 46.954,109.819 46.954,109.537 46.99,108.255 46.99,101.092 ; B2.4 79.06,104.455 79.06,97.841 ; R9.2 79.06,97.841 ; K7.1 83.82,34.925 IC3.6 83.82,48.99 84.988,50.158 ; K10.3 81.285,66.675 ; C3.2 88.9,96.835 90.805,98.74 90.805,108.128 93.167,110.49 96.077,110.49 96.103,110.516 97.577,110.516 97.603,110.49 98.74,110.49 ; IC3.32 84.988,50.158 ; K3.1 98.74,118.43 98.74,110.49 ; C6.2 98.105,73.33 98.74,73.965 R15.2 98.74,85.31 IC2.4 ; R8.2 98.74,110.49 ; K12.4 101.28,119.06 C7.2 101.28,97.475 104.14,94.615 C2.2 ; C11.2 113.98,37.567 114.3,37.887 IC3.18 115.57,42.45 115.57,66.675 K6.4 113.03,70.485 C10.2 113.03,77.927 112.71,78.247 C8.2 116.84,81.915 124.78,89.855 C02.2 ; 79.06,97.841 82.042,97.841 82.042,77.663 C9.2 81.6,76.835 80.645,77.79 C13.2 79.375,75.382 78.11,74.117 C12.2 78.11,69.85 81.285,66.675 ; 81.285,66.675 84.988,62.972 84.988,50.158
  Bottom Layer w0.635: T4.3 35.077,58.776 35.077,62.493 35.449,62.865 40.132,62.865 T5.3 48.768,66.675 C5.2 ; C4.2@46.477,119.195 46.54,119.195 47.687,118.048 54.341,118.048 55.038,118.745 IC1.2 ; B1.4 66.675,102.87 B2.4 ; K10.3 85.827,68.682 98.323,68.682 100.203,66.802 ; K3.1 99.695,122.555 K12.4 114.3,122.555 C01.2 116.84,122.555 K13.4 ; K11.6 100.203,66.802 ; C2.2 104.572,93.777 104.572,91.142 IC2.4 101.06,86.265 C10.2 ; K6.4 113.868,69.647 100.965,69.647 100.203,68.885 100.203,66.802
NetB1_2: B1.2 K2.1 RE1.22 | length 42
  Bottom Layer w0.635: K2.1 46.99,100.33 B1.2 69.215,92.71 RE1.22
NetB1_3: B1.3 B2.2 K1.1 RE1.11 | length 41.8
  Top Layer w0.635: B2.2 65.354,108.001 65.354,97.579 RE1.11
  Bottom Layer w0.635: B1.3 56.555,95.845 RE1.11 ; B2.2 66.04,109.855 K1.1@75.889,119.704
NetB2_1: B2.1 C4.1 IC1.1 | length 19.7
  Top Layer w0.635: IC1.1 56.515,121.285 58.42,119.38 B2.1
  Bottom Layer w0.635: C4.1 53.34,119.38 IC1.1
NetB2_3: B2.3 K1.2 RE1.21 | length 28.4
  Top Layer w0.635: K1.2@70.933,120.837 70.933,112.208 B2.3 68.58,107.493 72.847,103.226 72.847,97.572 RE1.21
NetC03_2: C03.2 IC3.38 K12.3 R01.2 | length 136.6
  Top Layer w0.635: K12.3 102.489,117.729 102.489,110.871 112.593,100.766 112.593,100.003 112.776,99.821 112.776,98.789 112.72,98.284 112.597,97.165 112.278,96.847 112.278,94.923 112.613,94.589 114.087,94.589 cw(c114.3,93.99) 114.513,94.588 116.231,94.589 117.272,93.548 118.313,93.548 120.015,95.25 R01.2 C03.2
  Bottom Layer w0.635: IC3.38 74.302,54.712 73.762,54.712 72.288,56.185 72.288,64.491 61.976,74.803 61.976,77.216 K12.3
NetC04_2: C04.2 IC3.39 K12.2 R02.2 | length 110
  Top Layer w0.635: K12.2 103.378,116.078 103.378,113.792 113.665,103.505 R02.2 113.665,98.74 C04.2
  Bottom Layer w0.635: IC3.39 73.66,63.856 79.731,69.926 89.535,69.926 95.783,76.175 95.783,88.036 90.907,92.913 90.907,103.607 K12.2
NetC05_2: C05.2 IC3.37 K12.1 R05.2 | length 128
  Top Layer w0.635: K12.1 111.76,114.935 113.35,113.345 C05.2 R05.2
  Bottom Layer w0.635: IC3.37 80.793,54.557 111.53,54.557 113.132,56.159 113.132,59.131 114.3,60.3 119.913,60.3 125.222,65.608 125.222,94.488 K12.1
NetC6_1: C6.1 IC3.9 R5.1 | length 28.1
  Top Layer w0.635: IC3.9 95.25,44.99 95.25,57.109 96.205,58.064 R5.1 C6.1
NetC7_1: C7.1 IC2.5 R4.2 | length 10.5
  Top Layer w0.635: R4.2 98.74,101.91 99.38,101.27 C7.1 99.38,96.708 99.695,96.393 IC2.5
NetC11_1: C11.1 IC3.17 L1.2 | length 12.9
  Top Layer w0.635: L1.2 111.76,31.267 112.08,31.587 C11.1 112.08,37.567 111.76,37.887 IC3.17
NetC12_1: C12.1 IC3.10 R14.1 | length 61.7
  Top Layer w0.635: v1(87.63,42.443) 87.63,48.768 92.604,53.742 92.604,57.76 90.297,60.066 90.297,67.818 88.9,69.215 81.28,69.215 80.01,70.485 C12.1 80.01,73.482 81.28,74.752 86.396,74.752 88.163,76.52 R14.1
  Bottom Layer w0.635: v1(87.63,42.443) 87.63,40.608 88.868,39.37 92.17,39.37 IC3.10
NetC13_1: C13.1 IC2.2 R13.2 | length 23.8
  Top Layer w0.635: R13.2 79.06,84.338 ; C13.1 79.06,82.535 79.06,84.338 ; v1(80.645,83.185) 80.473,83.185 79.865,83.794 79.605,83.794 79.06,84.338
  Bottom Layer w0.635: v1(80.645,83.185) 82.725,85.265 82.725,85.494 84.684,87.452 93.428,87.452 IC2.2
NetC14_1: C14.1 K11.3 | length 6.4
  Top Layer w0.635: C14.1 104.135,71.1 104.14,71.095 K11.3
NetC14_2: C14.2 D3.2 IC3.29 | length 50.8
  Top Layer w0.635: IC3.29 99.06,55.423 110.388,55.423 110.388,71.272 106.045,75.616 102.235,75.616 C14.2
  Bottom Layer w0.635: D3.2 99.06,58.785 IC3.29
NetD1_2: D1.2 RE1.A2 T1.1 | length 99.6
  Top Layer w0.635: T1.1 41.631,122.784 57.328,122.784 66.675,113.436 66.675,96.153 61.998,91.477 61.998,90.133 62.948,89.183 64.292,89.183 65.777,90.669 66.303,90.669 66.675,90.297 66.675,79.99 RE1.A2 71.12,75.149 70.485,74.514 70.485,71.12 D1.2
NetEnc1_A1: Enc1.A1 K14.3 | length 8.4
  Bottom Layer w0.635: Enc1.A1 165.534,71.12 K14.3
NetEnc1_B1: Enc1.B1 K14.2 | length 9.5
  Bottom Layer w0.635: Enc1.B1 163.785,73.66 K14.2
NetEnc1_C1: Enc1.C1 Enc1.MH2 K14.4 | length 29.9
  Bottom Layer w0.635: Enc1.MH2 149.17,73.775 Enc1.C1 159.842,72.447 159.842,70.485 161.747,68.58 K14.4
NetEnc1_MH1: Enc1.MH1 K14.1 | length 32.1
  Bottom Layer w0.635: Enc1.MH1 145.339,72.606 145.339,76.937 146.05,77.648 150.927,77.648 151.946,76.628 158.874,76.628 159.842,77.597 168.148,77.597 K14.1
NetIC2_1: IC2.1 R14.2 | length 11.2
  Top Layer w0.635: R14.2 v1(88.265,85.522)
  Bottom Layer w0.635: v1(88.265,85.522) 89.008,86.265 IC2.1
NetIC2_3: IC2.3 R15.1 | length 6.4
  Top Layer w0.635: R15.1 96.84,82.956 97.155,83.271 IC2.3
NetIC2_6: IC2.6 R1.2 R8.1 | length 16.3
  Top Layer w0.635: R8.1 96.84,107.254 95.656,106.07 95.656,102.499 96.835,101.321 R1.2 96.835,97.043 97.155,96.723 IC2.6
NetIC2_7: IC2.7 R1.1 R5.2 | length 42.3
  Top Layer w0.635: R1.1 94.935,97.043 94.615,96.723 IC2.7 100.863,87.827 100.863,81.915 99.822,80.874 99.822,67.716 99.314,67.209 99.314,62.23 98.679,61.595 R5.2
NetIC3_1: IC3.1 R19.2 | length 5.6
  Top Layer w0.635: R19.2 71.115,38.354 71.12,38.359 IC3.1
NetIC3_2: IC3.2 K7.2 R16.2 | length 14.5
  Top Layer w0.635: K7.2 79.375,30.317 79.695,29.997 R16.2
  Bottom Layer w0.635: IC3.2 73.66,38.735 K7.2
NetIC3_7: IC3.7 K5.1 | length 8.2
  Top Layer w0.635: K5.1 IC3.7
NetIC3_8: IC3.8 K5.2 | length 8.2
  Top Layer w0.635: K5.2 IC3.8
NetIC3_12: IC3.12 K9.1 | length 6.9
  Top Layer w0.635: K9.1 IC3.12
NetIC3_13: IC3.13 K9.2 | length 6.9
  Top Layer w0.635: K9.2 IC3.13
NetIC3_14: IC3.14 K9.3 | length 6.9
  Top Layer w0.635: K9.3 IC3.14
NetIC3_15: IC3.15 K9.4 | length 6.9
  Top Layer w0.635: K9.4 IC3.15
NetIC3_16: IC3.16 K9.5 | length 6.9
  Top Layer w0.635: K9.5 IC3.16
NetIC3_19: IC3.19 R7.2 | length 184.5
  Top Layer w0.635: v1(29.21,45.085) 30.556,46.431 30.556,55.996 29.184,57.368 29.184,60.742 29.518,61.077 34.727,61.077 35.098,61.448 35.098,74.793 32.968,76.923 32.968,92.493 35.56,95.085 35.56,109.855 v1(38.1,112.395) ; R7.2 v1(40.005,123.19)
  Bottom Layer w0.635: v1(29.21,45.085) 31.608,42.687 31.608,41.417 33.884,39.141 58.801,39.141 63.316,43.657 114.364,43.657 IC3.19 ; v1(38.1,112.395) 38.1,121.285 v1(40.005,123.19)
NetIC3_20: IC3.20 K4.1 | length 9.9
  Bottom Layer w0.635: IC3.20 123.73,41.18 K4.1
NetIC3_21: IC3.21 K4.2 | length 12.4
  Top Layer w0.635: IC3.21 119.38,55.88 K4.2
NetIC3_22: IC3.22 K4.3 | length 13.5
  Bottom Layer w0.635: IC3.22 123.285,50.165 K4.3
NetIC3_23: IC3.23 K6.2 | length 15.1
  Top Layer w0.635: v1(118.796,58.496) 118.796,64.821 K6.2
  Bottom Layer w0.635: IC3.23 116.186,58.496 v1(118.796,58.496)
NetIC3_24: IC3.24 K6.3 | length 17.5
  Top Layer w0.635: IC3.24 113.005,57.855 v1(113.005,66.878)
  Bottom Layer w0.635: v1(113.005,66.878) 113.843,66.878 114.808,65.913 117.348,65.913 K6.3
NetIC3_27: IC3.27 K11.1 | length 13.5
  Top Layer w0.635: IC3.27 108.077,60.547 108.077,66.548 K11.1
NetIC3_28: IC3.28 K11.4 | length 9.8
  Top Layer w0.635: IC3.28 104.14,59.15 K11.4
NetIC3_30: IC3.30 K11.5 | length 13.4
  Top Layer w0.635: IC3.30 100.203,60.293 100.203,66.548 K11.5
NetIC3_33: IC3.33 K10.1 | length 10.1
  Top Layer w0.635: IC3.33 K10.1
NetIC3_34: IC3.34 K10.2 | length 10.1
  Top Layer w0.635: IC3.34 K10.2
NetIC3_35: IC3.35 K13.2 R22.1 | length 114.7
  Top Layer w0.635: v1(120.193,63.627) 123.393,63.627 127.762,67.996 127.762,100.076 122.748,105.09 ; R22.1 122.748,105.09 ; K13.2 129.54,117.475 130.937,116.078 130.937,109.042 126.985,105.09 122.748,105.09
  Bottom Layer w0.635: IC3.35 84.995,57.785 97.688,57.785 97.892,57.582 97.892,55.446 100.228,55.446 100.228,59.08 104.775,63.627 v1(120.193,63.627)
NetIC3_36: IC3.36 K13.1 R21.1 | length 133.8
  Top Layer w0.635: IC3.36 81.28,63.881 75.54,69.621 75.54,102.54 74.93,103.149 74.93,104.407 71.082,108.255 71.082,110.923 72.592,112.433 78.015,112.433 84.763,119.182 84.892,119.182 90.221,124.511 116.027,124.511 119.634,120.904 119.634,111.44 R21.1 124.775,111.44 K13.1
NetIC4_1: IC4.1 K15.1 | length 25.4
  Top Layer w0.635: K15.1 141.668,101.536 141.668,116.446 144.602,119.38 IC4.1
NetIC4_2: IC4.2 LD1.11 | length 24.5
  Top Layer w0.635: IC4.2 v1(147.853,118.11)
  Bottom Layer w0.635: v1(147.853,118.11) 148.819,117.145 160.807,117.145 162.382,115.57 162.382,110.312 LD1.11
NetIC4_3: IC4.3 LD1.7 | length 59.7
  Top Layer w0.635: IC4.3 148.438,116.84 149.073,117.475 149.073,118.796 146.05,121.818 144.78,121.818 140.779,117.818 140.779,97.777 143.713,94.844 157.074,94.844 LD1.7
NetIC4_4: IC4.4 LD1.4 | length 45.6
  Top Layer w0.635: IC4.4 148.844,115.57 149.962,116.688 149.962,118.11 153.467,121.615 169.926,121.615 173.431,118.11 173.431,107.188 171.958,107.188 LD1.4
NetIC4_5: IC4.5 LD1.2 | length 48.1
  Top Layer w0.635: v1(142.875,114.3) IC4.5
  Bottom Layer w0.635: v1(142.875,114.3) 142.875,117.094 146.05,120.269 161.014,120.269 166.04,115.243 166.04,107.01 LD1.2
NetIC4_6: IC4.6 LD1.1 | length 47.2
  Top Layer w0.635: v1(144.17,105.614) 144.17,113.03 IC4.6
  Bottom Layer w0.635: v1(144.17,105.614) 144.802,104.982 144.802,102.569 144.069,101.836 144.069,96.799 144.78,96.088 168.478,96.088 LD1.1
NetIC4_7: IC4.7 LD1.10 | length 26.2
  Top Layer w0.635: IC4.7 v1(148.158,111.76)
  Bottom Layer w0.635: v1(148.158,111.76) 151.613,115.214 160.655,115.214 161.417,114.452 160.218,113.254 160.218,108.615 161.29,107.544 LD1.10
NetIC4_8: IC4.8 LD1.5 | length 37.7
  Top Layer w0.635: IC4.8 148.946,110.49 150.216,111.76 150.216,114.008 153.67,117.462 153.67,120.498 160.172,120.498 LD1.5
NetIC4_9: IC4.9 LD1.3 | length 55.5
  Top Layer w0.635: v1(143.586,103.784) 145.237,103.784 147.625,106.172 147.625,108.585 146.99,109.22 IC4.9
  Bottom Layer w0.635: v1(143.586,103.784) 143.18,103.378 143.18,96.139 144.78,94.539 169.088,94.539 172.542,97.993 172.542,103.048 LD1.3
NetIC4_12: IC4.12 LD1.6 | length 21.8
  Top Layer w0.635: IC4.12 159.131,109.22 160.223,108.128 172.542,108.128 172.542,110.668 LD1.6
NetIC4_13: IC4.13 LD1.8 | length 14.8
  Top Layer w0.635: IC4.13 154.014,110.49 153.773,110.249 153.773,106.68 158.853,101.6 LD1.8
NetIC4_14: IC4.14 LD1.9 | length 23.8
  Top Layer w0.635: IC4.14 153.506,111.76 152.884,111.138 152.884,105.637 158.191,100.33 161.747,100.33 162.382,100.965 162.382,103.048 LD1.9
NetIC4_15: IC4.15 LD1.12 | length 6.5
  Top Layer w0.635: IC4.15 157.632,113.03 158.902,111.76 LD1.12
NetIC4_16: IC4.16 K15.2 | length 28.1
  Top Layer w0.635: K15.2 149.708,96.037 153.67,96.037 154.381,96.749 154.381,101.524 151.995,103.91 151.995,112.295 154,114.3 IC4.16
NetIC4_17: IC4.17 K15.3 | length 24
  Top Layer w0.635: IC4.17 157.353,115.57 v1(158.928,113.995)
  Bottom Layer w0.635: K15.3 158.928,106.223 v1(158.928,113.995)
NetIC4_18: IC4.18 K15.4 | length 22.2
  Top Layer w0.635: K15.4 151.106,99.719 151.106,113.641 154.305,116.84 IC4.18
NetK2_2: K2.2 RE1.12 RE1.24 | length 45.6
  Top Layer w0.635: RE1.12 71.12,98.305 RE1.24
  Bottom Layer w0.635: K2.2 37.465,90.805 RE1.12
NetK3_2: K3.2 R2.1 R4.1 R9.1 R13.1 | length 91.7
  Top Layer w0.635: R13.1 80.96,94.92 ; R9.1 80.96,94.92 ; R2.1 90.17,118.11 K3.2 ; R4.1 96.84,105.893 98.491,107.544 99.822,107.544 99.822,121.387 99.111,122.098 94.158,122.098 K3.2 ; 80.96,94.92 78.181,94.92 76.581,96.52 76.581,104.013 75.565,105.029 75.565,105.561 71.971,109.155 71.971,110.555 72.96,111.544 78.511,111.544 86.982,120.015 K3.2
NetK8_1: K8.1 L2.3 | length 23.5
  Top Layer w0.635: K8.1 37.973,33.655 37.973,32.893 38.989,31.877 42.037,31.877 43.18,33.02 43.18,37.198 40.005,40.373 L2.3 L2.3@39.878,46.228
NetK8_2: K8.2 L2.2 | length 17.2
  Top Layer w0.635: L2.2 41.275,37.465 K8.2@41.275,32.875
NetL2_4: L2.4 T3.2 | length 16.4
  Bottom Layer w0.635: L2.4 41.275,47.625 T3.2
NetR3_2: R3.2 R6.1 Z2.1 | length 8.6
  Top Layer w0.635: R3.2 R6.1 46.99,98.745 Z2.1
NetR7_1: R7.1 R10.1 T1.2 | length 12.3
  Top Layer w0.635: 33.02,123.505 33.203,123.323 33.667,123.323 33.799,123.19 R7.1 35.88,119.548 33.909,117.577 33.909,116.444 33.734,116.27 33.734,114.887 T1.2
NetR17_2: R17.2 T2.2 T4.1 T5.2 | length 53.3
  Top Layer w0.635: T2.2 46.355,45.618 46.67,45.933 R17.2
  Bottom Layer w0.635: T4.1 39.751,60.452 T5.2 51.943,59.055 57.429,53.569 57.429,43.764 55.702,42.037 T2.2
NetR18_1: R18.1 T2.3 T5.1 | length 37.6
  Top Layer w0.635: T5.1 42.545,40.792 43.967,39.37 46.482,39.37 T2.3 47.752,53.34 48.387,53.975 R18.1
NetR18_2: R18.2 T3.1 | length 6.5
  Top Layer w0.635: R18.2 51.115,53.746 52.299,53.746 T3.1
NetR19_1: R19.1 R20.1 T4.2 | length 58.4
  Top Layer w0.635: R20.1 32.944,60.005 33.894,59.055 T4.2 41.529,55.118 41.529,40.107 43.18,38.456 67.615,38.456 69.215,36.855 R19.1
VIN: B1.1 C1.1 R3.1 R17.1 T2.1 T3.3 | length 81.6
  Top Layer w0.635: C1.1 C1.1@44.45,77.31
  Top Layer w1.27: R3.1 43.18,78.58 C1.1 50.005,83.185 50.165,83.185 B1.1 ; C1.1@44.45,77.31 44.45,63.566 44.77,63.246 R17.1 44.77,45.273 T2.1
  Bottom Layer w1.27: T2.1 44.45,41.148 44.45,42.672 46.863,45.085 T3.3
pads on no net: Enc1.MH3 Enc1.MH4 IC3.3 IC3.4 IC3.11 IC3.25 IC3.26 IC3.40 IC4.10 IC4.11 IC4.19 IC4.20 RE1.14

## Polygon pours and split planes (outlines as drawn)
GND on Bottom Layer "PolyBoTGND" (solid, pour order 6): 139.7,123.825 174.625,123.825 174.625,88.9 139.7,88.9
GND on Bottom Layer "PolyBoTGND" (solid, pour order 0): 26.035,126.365 133.985,126.365 133.985,26.035 26.035,26.035
GND on Bottom Layer "PolyBOTGND" (solid, pour order 4): 140.97,85.725 173.355,85.725 173.355,63.5 140.97,63.5
GND on Top Layer "PolyTopGND" (solid, pour order 2): 139.446,123.774 174.371,123.774 174.371,88.849 139.446,88.849
GND on Top Layer "PolyTopGND" (solid, pour order 1): 26.035,126.365 133.985,126.365 133.985,26.035 26.035,26.035
GND on Top Layer "PolyTOPGND" (solid, pour order 3): 140.97,85.725 173.355,85.725 173.355,62.865 172.72,63.5 140.97,63.5

## Silkscreen, mask and mechanical layers (free items; w line width, h text height)
Top Overlay:
  lines w0.254: 137.795,25.4 137.795,127 ; 137.795,62.23 177.8,62.23 ; 137.795,86.995 165.735,86.995 171.45,86.995 177.8,86.995